# Altium PCB Day10F206.PCBDOC
Units mm, origin at the board's own origin, x right, y up, seen from the top; angles counter-clockwise.
Board outline 152.4 x 101.6 mm, 2 copper layers (Top Layer, Bottom Layer); 35 components, 21 nets, 87 pads, 0 vias.
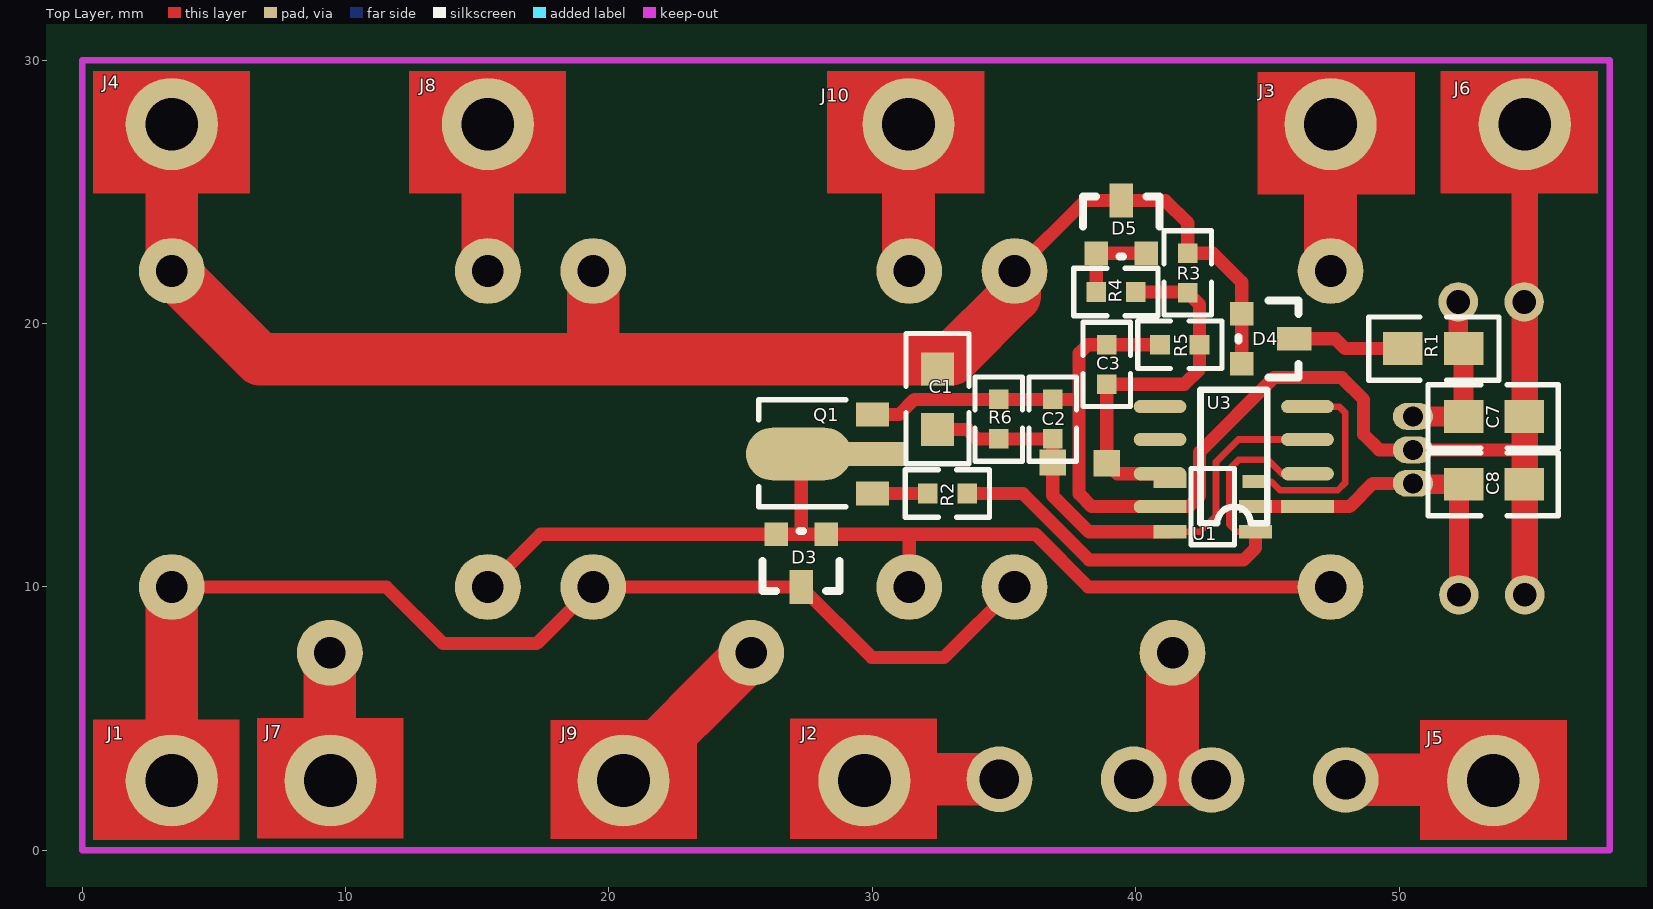
[diagram p0: Top Layer view]
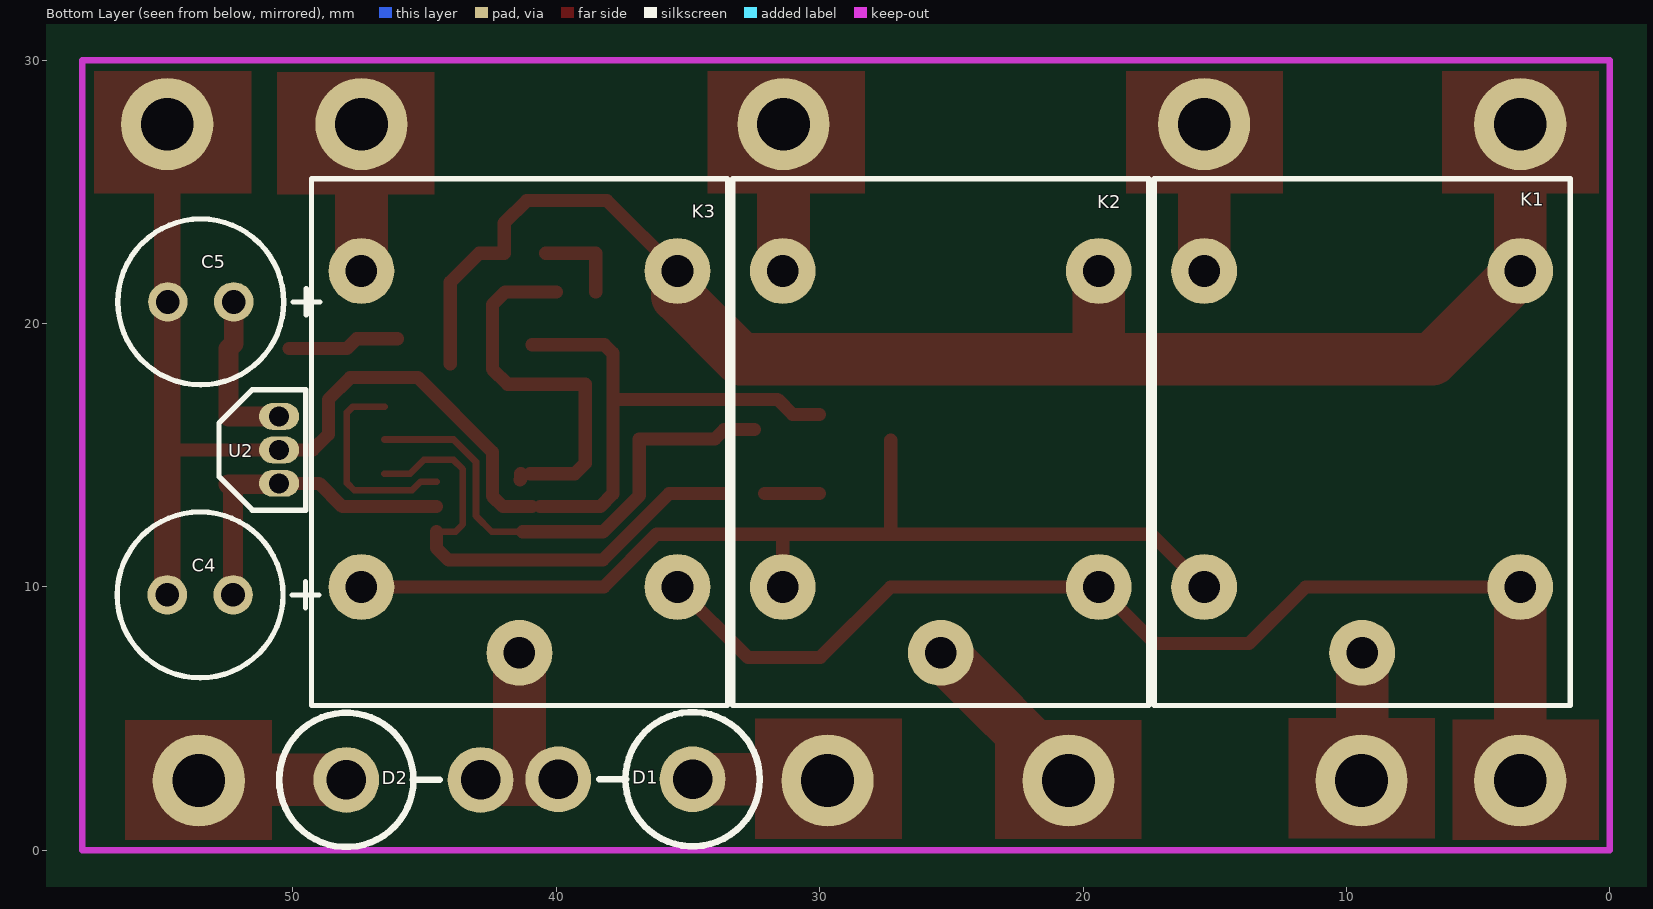
[diagram p1: Bottom Layer view, seen from below]

## Layer stack, top to bottom
Top Layer: signal copper 0.0356
Dielectric: dielectric 0.32, FR-4, Dk 4.8
Bottom Layer: signal copper 0.0356

## Board outline
-24.6,-34.6 127.8,-34.6 127.8,67 -24.6,67

## Design rules (kind name [scope] priority, off if disabled: settings)
Clearance [All] p1: gap=0.25
ComponentClearance [All] p1 off: gap=0 collisioncheckmode=2
PolygonConnect [All] p1: connectstyle=Relief reliefconductorwidth=0.254 reliefentries=4 polygonreliefangle="90 Angle"
RoutingLayers [All] p1: top layer=Horizontal bottom layer=Vertical
RoutingVias [All] p1: holewidth=0.711 width=1.27 viastyle="Through Hole" minholewidth=0.711 minwidth=1.27 maxholewidth=0.711 maxwidth=1.27
SolderMaskExpansion [All] p1: expansion=0.102
TestPointUsage [All] p1: valid=0 allowmultiple=FALSE
Testpoint [All] p1: side=15 testpointundercomponent=TRUE minsize=1.016 maxsize=2.54 preferedsize=1.524 minholesize=0 maxholesize=1.016 preferedholesize=0.813 testpointgrid=0.025 style=1023 order=1234567890
Width [All] p1: maxlimit=3 minlimit=0.25 preferedwidth=0.254 toplayer_prefwidth=0.5 bottomlayer_prefwidth=0.25 minimp=50.000000 maximp=50.000000 favimp=50.000000
16 further rules are at their usual default settings.

## Components (designator, comment, footprint, x,y, rotation, side; value= is the part's Value field where it differs from the comment)
C1 "100nF" 0805#1 32.475,18.275 r270 top
C2 "10nF" 0603 36.85,15.625 r90 top
C3 "100nF" 0603 38.9,19.2 r270 top
C4 "330uF" "RA 6.3mm" 52.275,9.7 r0 bottom
C5 "47uF" "RA 6.3mm" 52.25,20.825 r0 bottom
C7 "330nF" 0805#2 52.45,16.475 r0 top
C8 "100nF" 0805#2 52.45,13.9 r0 top
D1 "DIODE" "DIODE0.7 RADIAL" 34.825,2.7 r0 bottom
D2 "DIODE" "DIODE0.7 RADIAL" 47.975,2.675 r180 bottom
D3 "BAV70" SOT-23 28.25,12 r180 top
D4 "BAV70" SOT-23 44.025,20.375 r270 top
D5 "BZX84C9V1" SOT-23 38.5,22.675 r0 top
J1 "CON1" "SIP1 - WIRE" 3.4,2.65 r90 top (schematic designator J?)
J2 "CON1" "SIP1 - WIRE" 29.7,2.65 r90 top (schematic designator J?)
J3 "CON1" "SIP1 - WIRE" 47.4,27.575 r90 top (schematic designator J?)
J4 "CON1" "SIP1 - WIRE" 3.4,27.575 r90 top (schematic designator J?)
J5 "CON1" "SIP1 - WIRE" 53.575,2.65 r90 top (schematic designator J?)
J6 "CON1" "SIP1 - WIRE" 54.775,27.575 r90 top (schematic designator J?)
J7 "CON1" "SIP1 - WIRE" 9.425,2.65 r90 top (schematic designator J?)
J8 "CON1" "SIP1 - WIRE" 15.4,27.575 r90 top (schematic designator J?)
J9 "CON1" "SIP1 - WIRE" 20.55,2.65 r90 top (schematic designator J?)
J10 "CON1" "SIP1 - WIRE" 31.375,27.575 r90 top (schematic designator J?)
K1 "RELAY-LF" RELAY5PIN 3.4,10 r0 bottom
K2 "RELAY-RF" RELAY5PIN 19.4,10 r0 bottom
K3 "RELAY-GABARIT" RELAY5PIN 35.4,10 r0 bottom
Q1 "BCX56-16" SOT-89 30,13.55 r90 top
R1 "470" 0805#2 52.45,19.05 r180 top
R2 "2k4" 0603 32.1,13.55 r0 top
R3 "20k 1%" 0603 41.975,22.675 r270 top
R4 "1k 1%" 0603 40,21.2 r180 top
R5 "10k 1%" 0603 40.925,19.2 r0 top
R6 "100k 1%" 0603 34.8,17.125 r270 top
U1 "PIC10F206" "SOT-23 - 6 WIDE" 41.3,14 r270 top
U2 "VOLTREG" TO-92B 50.525,16.475 r270 bottom
U3 "PIC12F683" SO-8 46.525,13.05 r180 top

## Footprints (in the part's own frame and the unit in brackets; to place one, negate y for a bottom-side part, rotate by r counter-clockwise, add the part's x,y. Pads: shape width x height; smd on the part's side, far side on the other; paste and mask are expansions set on the pad)
0603 [mm]
  rect 0.75x0.75 smd: 1(0,0) 2(1.5,0)
  silkscreen extent -0.85,-0.9 2.35,0.9
0805#1 [mm]
  rect 1.25x1.25 smd: 1(0,0) 2(2.3,0)
  silkscreen extent -1.35,-1.2 3.6,1.2
0805#2 [mm]
  rect 1.5x1.25 smd: 1(0,0) 2(2.3,0)
  silkscreen extent -1.35,-1.2 3.6,1.2
"DIODE0.7 RADIAL" [mm]
  round 2.5 hole 1.5: A(5.1,0) K(0,0)
  silkscreen extent -2.55,-2.55 3.55,2.55
"RA 6.3mm" [mm]
  round 1.5 hole 0.9: 1(0,0) 2(2.5,0)
  silkscreen extent -3.27,-3.15 4.4,3.15
RELAY5PIN [mm]
  round 2.5 hole 1.2: 1(6,2.5) 2(0,-12) 3(12,-12) 4(12,0) 5(0,0)
  silkscreen extent -1.9,-15.5 13.9,4.5
"SIP1 - WIRE" [mm] "For Wire 2mm"
  round 3.5 hole 2: 1(0,0)
SO-8 [mm]
  rect 2x0.5 smd: 1(0,0)
  oval 2x0.5 smd: 2(0,-1.25) 3(0,-2.55) 4(0,-3.8) 5(5.6,-3.8) 6(5.6,-2.55) 7(5.6,-1.25) 8(5.6,0)
  silkscreen extent 1.52,-4.44 4.06,0.64
SOT-23 [mm]
  rect 0.9x0.9 smd: 1(0,0) 3(1.9,0)
  rect 0.9x1.3 smd: 2(0.95,2)
  silkscreen extent -0.51,-0.13 2.41,2.16
"SOT-23 - 6 WIDE" [mm]
  rect 0.5x1.25 smd: 1(0,0) 2(0.95,0) 3(1.9,0) 4(1.9,3.25) 5(0.95,3.25)
  rect 0.5x1 smd: 6(0,3.25)
  silkscreen extent -0.5,0.8 2.4,2.45
SOT-89 [mm]
  rect 0.9x1.25 smd: 1(0,0) 3(3,0)
  oval 2x4 smd: 2(1.5,2.8)
  rect 0.9x2.55 smd: 2(1.5,0)
  silkscreen extent -0.51,1.02 3.56,4.32
TO-92B [mil]
  oval 40x60 hole 30: 1(0,0) 2(50,0) 3(100,0)
  silkscreen extent -40,-90 140,40

## Part data
C1 C2 C3 C7 C8: library part CAP, "Capacitor"
C4 C5: library part "CAPACITOR POL", "Capacitor"
D1 D2: "Diode"
D3 D4 D5: library part "DUAL DIODE BAV70"
J1 J2 J3 J4 J5 J6 J7 J8 J9 J10: "Connector"
K1 K2 K3: library part RELAY-SPDT
Q1: library part NPN1, "NPN Transistor"
R1 R2 R3 R4 R5 R6: library part RES1

## Free pads (board coordinates)
  rect 1x1 smd: 0(36.85,14.725) 0(38.9,14.7)

## Nets (pads, with @x,y where several pads share a name; then routed paths per layer and width w, separated by ;. In a path a pad name is that pad's centre, name@x,y a point inside that pad or via, vN(x,y) a via of type N, cw(c..) or ccw(c..) an arc to the next point about the centre after c; other vN are vias at no path point)
8.0V: C5.1 C7.1 R1.1 U2.1 | length 6.4
  Top Layer w0.75: U2.1 C7.1 R1.1 52.25,19.25 C5.1
COIL: D3.1 D3.3 K1.4 K2.4 K3.4 Q1.2 | length 39.2
  Top Layer w0.25: K2.4 K2.4@31.425,10.025
  Top Layer w0.5: K1.4 17.4,12 36.2,12 38.2,10 K3.4 ; 27.3,12 Q1.2@27.3,15.575 ; K2.4 31.4,11.975
FUSE_G: J3.1 K3.3 | length 5.6
  Top Layer w2: K3.3 J3.1
FUSE_LF: J8.1 K1.3 | length 5.6
  Top Layer w2: K1.3 J8.1
FUSE_RF: J10.1 K2.3 | length 5.5
  Top Layer w2: K2.3@31.375,22.025 J10.1
GAB: D1.A D2.A K3.1 | length 7.8
  Top Layer w0.25: D1.A D1.A@39.95,2.675
  Top Layer w2: D1.A@39.95,2.675 D2.A ; 41.4,2.675 K3.1
GND: C2.2 C3.1 C4.2 C5.2 C7.2 C8.2 J6.1 Q1.3 R5.1 R6.1 U1.2 U2.2 U3.8 | length 56.3
  Top Layer w0.5: Q1.3 31.025,16.55 31.6,17.125 37.85,17.125 ; U3.8@40.625,13.05 38.332,13.05 37.85,13.532 37.85,18.875 38.175,19.2 R5.1 ; U3.8 42.025,13.05 42.425,13.45 42.425,15.125 45.25,17.95 47.825,17.95 48.65,17.125 48.65,15.8 49.245,15.205 54.755,15.205 ; 45.262,17.938 45.275,17.95
  Top Layer w1: C5.2 C5.2@54.775,20.8 ; C4.2 J6.1
KL15: D3.2 J1.1 K1.5 K2.5 K3.5 | length 43.3
  Top Layer w0.5: K1.5 11.55,10 13.7,7.85 17.25,7.85 K2.5 D3.2 29.975,7.325 32.725,7.325 K3.5
  Top Layer w2: J1.1 K1.5
LF: J7.1 K1.1 | length 4.8
  Top Layer w2: J7.1@9.4,2.675 K1.1
LG: D1.K J2.1 | length 5.1
  Top Layer w2: J2.1@29.75,2.7 D1.K
MCLR: U1.6 U3.4 | length 7.8
  Top Layer w0.25: U1.6 45.15,14 45.475,13.675 47.675,13.675 47.95,13.95 47.95,16.625 47.725,16.85 U3.4
MEASURE: C3.2 pad.0@38.9,14.7 R3.2 R4.1 R5.2 U1.1 U3.7 | length 14.9
  Top Layer w0.5: R4.1 41.95,21.2 42.425,20.725 42.425,18.275 41.85,17.7 C3.2 pad.0@38.9,14.7 ; U3.7@41,14.3 pad.0@39.3,14.3 ; U3.7@41.35,14.3 41.35,14.1 U1.1@41.375,14.075 ; pad.0@38.9,14.7 pad.0@39.3,14.3 ; pad.0@38.9,14.7 pad.0@39.3,14.3
NetD4_2: D4.2 R1.2 | length 4.3
  Top Layer w0.5: D4.2 47.575,19.425 47.95,19.05 R1.2
NetD5_1: D5.1 D5.3 R4.2 | length 3.4
  Top Layer w0.5: R4.2 D5.1 D5.3
NetQ1_1: Q1.1 R2.1 | length 2.1
  Top Layer w0.5: Q1.1 R2.1
OUT: R2.2 U1.4 U3.2 | length 19.4
  Top Layer w0.25: U1.4 43.825,12.1 43.55,12.375 43.55,14.475 43.9,14.825 45.032,14.825 45.557,14.3 U3.2
  Top Layer w0.5: R2.2 35.711,13.55 38.236,11.025 44.1,11.025 44.55,11.475 U1.4
PEAK: C1.2 C2.1 pad.0@36.85,14.725 R6.2 U1.3 U3.3 | length 19.5
  Top Layer w0.25: U1.3 42.45,12.1 43.05,12.7 43.05,14.75 43.9,15.6 U3.3
  Top Layer w0.5: C1.2 33.625,15.975 33.975,15.625 C2.1 36.85,13.471 38.221,12.1 U1.3@41.275,12.1
POWER: C1.1 D4.1 D4.3 D5.2 J4.1 K1.2 K2.2 K3.2 R3.1 | length 59
  Top Layer w0.5: K3.2 38.075,24.675 41.125,24.675 41.975,23.825 R3.1 42.925,22.675 44.025,21.575 D4.3
  Top Layer w2: J4.1 K1.2 6.75,18.65 33,18.65 35.4,21.05 K3.2 ; 19.4,18.65 K2.2
RF: J9.1 K2.1 | length 6.9
  Top Layer w2: J9.1 K2.1
RG: D2.K J5.1 | length 5.6
  Top Layer w2: D2.K J5.1@53.55,2.675
VCC: C4.1 C8.1 U1.5 U2.3 U3.1 | length 12.7
  Top Layer w0.5: U1.5 48.125,13.05 49.01,13.935 U2.3
  Top Layer w0.75: U2.3@50.56,13.9 C8.1 C8.1@52.275,13.725 ; C4.1 C8.1@52.275,13.875
pads on no net: U3.5 U3.6

## Keep-outs
Keep-Out Layer:
  lines w0.254: 0,0 0,30 58,30 58,0 0,0

## Other copper
Top Layer:
  rectangle net RG: 50.8,0.4 56.375,4.95
  rectangle net LG: 26.875,0.425 32.45,5
  rectangle net RF: 17.775,0.425 23.35,4.95
  rectangle net LF: 6.625,0.45 12.2,5.025
  rectangle net KL15: 0.4,0.4 5.975,4.975
  rectangle net FUSE_RF: 28.275,24.95 34.25,29.6
  rectangle net POWER: 0.4,24.95 6.375,29.6
  rectangle net GND: 51.575,24.95 57.55,29.6
  rectangle net FUSE_G: 44.625,24.9 50.6,29.55
  rectangle net FUSE_LF: 12.4,24.95 18.375,29.6